# Altium PCB PCB_LNA_BFU550.PcbDoc
Units mm, origin at the board's own origin, x right, y up, seen from the top; angles counter-clockwise.
Board outline 60.58 x 30.35 mm, 2 copper layers (Top Layer, Bottom Layer); 24 components, 12 nets, 56 pads, 0 vias.
Unrouted connection lines stored in the file: 1.
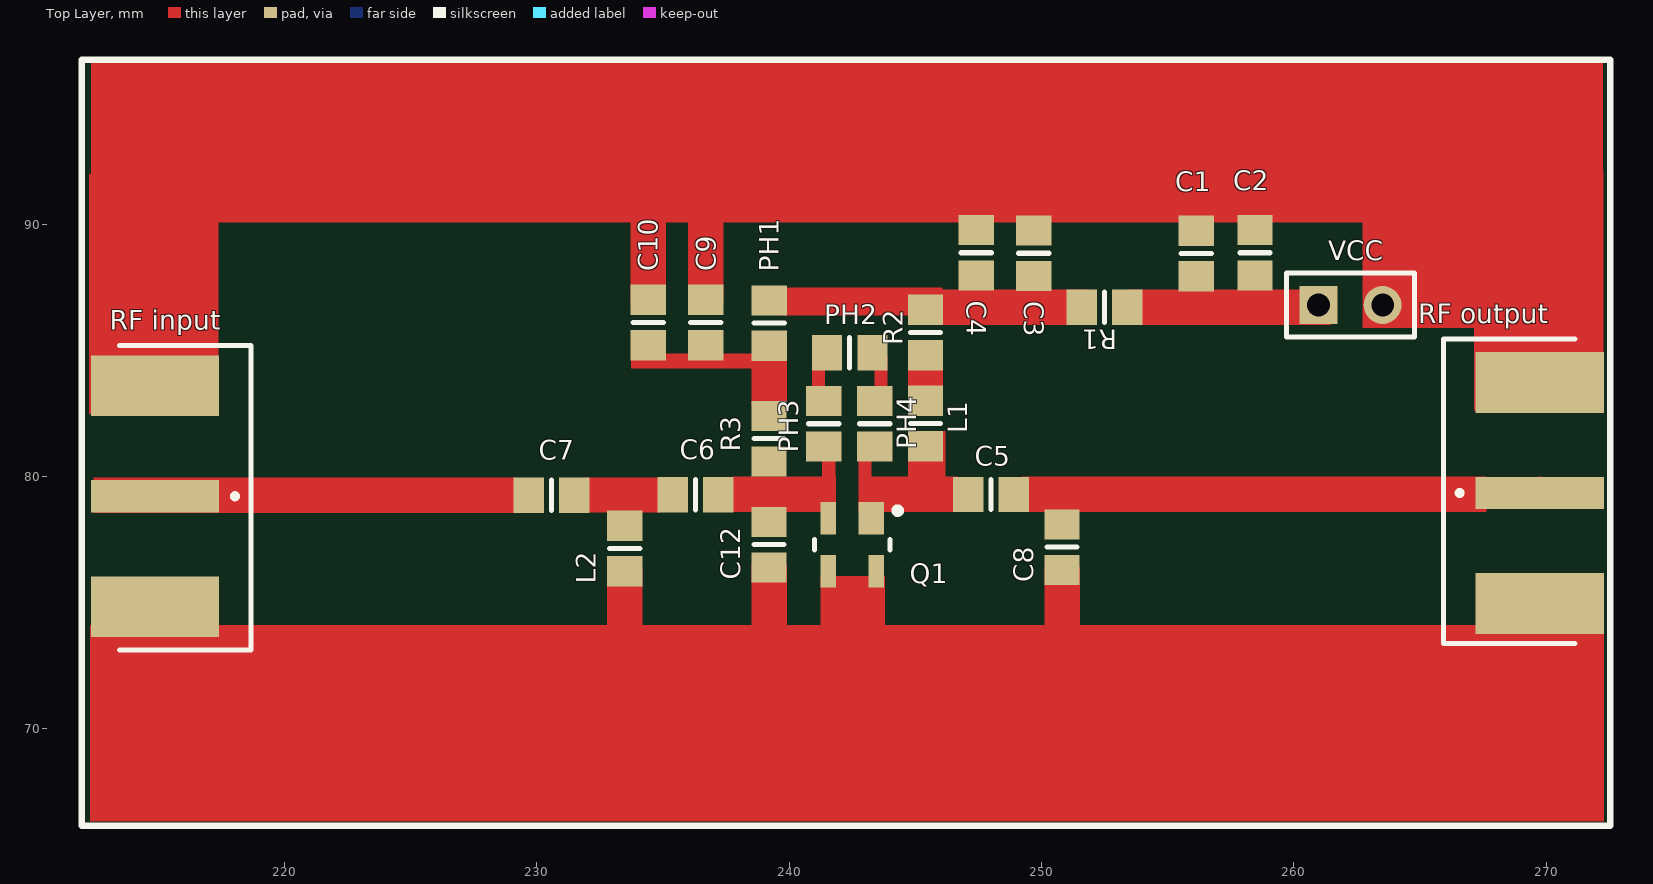
[diagram p0: Top Layer view]
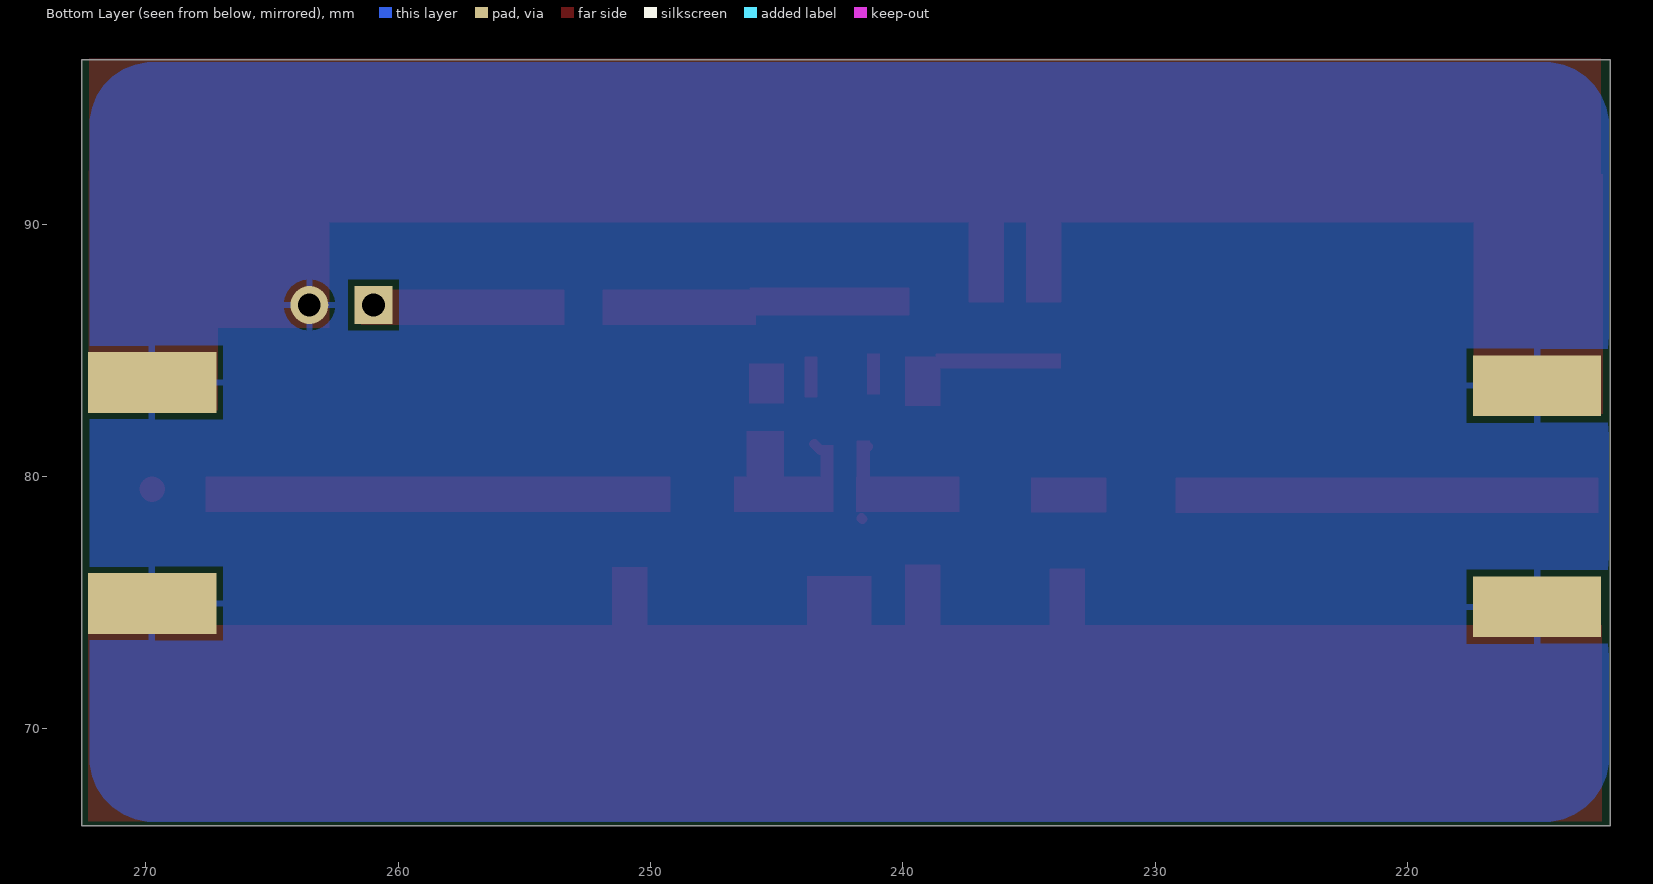
[diagram p1: Bottom Layer view, seen from below]

## Layer stack, top to bottom
Top Solder: solder mask 0.0102, Solder Resist, Dk 3.5
Top Layer: signal copper 0.0356
Dielectric 1: dielectric 0.32, FR-4, Dk 4.8
Bottom Layer: signal copper 0.0356
Bottom Solder: solder mask 0.0102, Solder Resist, Dk 3.5

## Board outline
211.963,66.167 211.963,96.52 272.542,96.52 272.542,66.167

## Design rules (kind name [scope] priority, off if disabled: settings)
Clearance [All] p1: gap=0.254 ignorepadtopadclearanceinfootprint=FALSE except(0: Arc-Hole Track-Hole SMDPad-Hole THPad-Hole Via-Hole Fill-Hole Poly-Hole Region-Hole Text-Hole)
ComponentClearance [All] p1: gap=0.01 collisioncheckmode=3 verticalgap=0.254 showdistances=FALSE donotcheckwithout3dbody=TRUE
MinimumSolderMaskSliver [All] p1: minsoldermaskwidth=0.152
PolygonConnect PolygonConnect_via [IsVia vs IsPolygon] p1: connectstyle=Direct reliefconductorwidth=0.254 reliefentries=4 polygonreliefangle="90 Angle" airgapwidth=0.254
PolygonConnect [All] p2: connectstyle=Relief reliefconductorwidth=0.254 reliefentries=4 polygonreliefangle="90 Angle" airgapwidth=0.254
RoomDefinition LNA_BFU500 [InComponentClass('LNA_BFU500')] p1: confinementstyle=ConfineIn formatcopy=TRUE lockcomponents=FALSE outline 178.943,26.924 300.482,26.924 300.482,111.379 178.943,111.379
RoutingVias [All] p1: holewidth=0.711 width=1.27 viastyle="Through Hole" minholewidth=0.711 minwidth=1.27 maxholewidth=0.711 maxwidth=1.27
SilkToSilkClearance [All] p1: silktosilkclearance=0.152
SilkToSolderMaskClearance [IsPad] p1: minsilkscreentomaskgap=0.152 clearancetoexposedcopper=TRUE
SolderMaskExpansion [All] p1: expansion=0.102 istentingtop=FALSE
Width [All] p1: maxlimit=2.54 minlimit=0.254 preferedwidth=0.254
26 further rules are at their usual default settings.

## Components (designator, comment, footprint, x,y, rotation, side; value= is the part's Value field where it differs from the comment)
C1 "Cap Pol2" 6-0805_N 256.14,88.84 r90 top value=56nF
C2 "Cap Pol2" 6-0805_N 258.46,88.87 r90 top value=220pF
C3 "Cap Pol2" 6-0805_N 249.69,88.85 r90 top value=3.9nF
C4 "Cap Pol2" 6-0805_N 247.41,88.87 r90 top value=220pF
C5 "Cap Pol2" 6-0805_N 248,79.29 r0 top value=47pF
C6 "Cap Pol2" 6-0805_N 236.29,79.28 r0 top value=5.6pF
C7 "Cap Pol2" 6-0805_N 230.58,79.26 r0 top value=47pF
C8 "Cap Pol2" 6-0805_N 250.81,77.2 r270 top value=1.8pF
C9 "Cap Pol2" 6-0805_N 236.7,86.11 r90 top value="no mounted"
C10 "Cap Pol2" 6-0805_N 234.42,86.11 r90 top value="no mounted"
C12 "Cap Pol2" 6-0805_N 239.2,77.3 r270 top value="no mounted"
L1 "Inductor" 6-0805_N 245.4,82.1 r270 top value=5.6nH
L2 "Inductor" 6-0805_N 233.48,77.15 r270 top value=8.2nH
PH1 "Res1" 6-0805_N 239.21,86.08 r90 top value=0
PH2 "Res1" 6-0805_N 242.4,84.903 r0 top value=0
PH3 "Res1" 6-0805_N 241.376,82.093 r90 top value=0
PH4 "Res1" 6-0805_N 243.386,82.093 r90 top value=0
Q1 "NPN" SOT-143_N 242.5,77.3 r270 top
R1 "" 6-0805_N 252.5,86.71 r0 top value=22
R2 "0" 6-0805_N 245.4,85.71 r90 top value=10
R3 "0" 6-0805_N 239.2,81.5 r90 top value=12K
"RF input" "SMB" SMA-142-0701-851_V2 214.86,79.22 r270 top
"RF output" "SMB" SMA-142-0701-851_V2 269.75,79.35 r90 top
VCC "Header 2" HDR1X2 260.98,86.8 r0 top

## Footprints (in the part's own frame and the unit in brackets; to place one, negate y for a bottom-side part, rotate by r counter-clockwise, add the part's x,y. Pads: shape width x height; smd on the part's side, far side on the other; paste and mask are expansions set on the pad)
6-0805_N [mm]
  rect 1.2x1.4 smd: 1(-0.9,0) 2(0.9,0)
  silkscreen extent 0,-0.6 0,0.6, body extent -1.07,-0.7 1.07,0.7, height 0.7
HDR1X2 [mm]
  rect 1.5x1.5 hole 0.9: 1(0,0)
  round 1.5 hole 0.9: 2(2.54,0)
  silkscreen extent -1.27,-1.27 3.81,1.27
SMA-142-0701-851_V2 [mil] "SMA 50 Ohm, End Launch Jack Receptacle, Tab Contact"
  rect 50x200 smd: 1(0,0)
  rect 95x200 smd: 2(-172.5,0) 2(172.5,0)
  rect 95x200 smd far side: 2(-172.5,0) 2(172.5,0)
  silkscreen extent -235,-55 240,150, body extent -187,-475 188,87, height 161
SOT-143_N [mm] "SOT143, 4-Leads, Body 2.9x1.3mm, Pitch 1.9mm, Lead Span 2.5mm, IPC Medium Density"
  rect 1.3x1 smd: 1(-1.05,0.75)
  rect 1.3x0.6 smd: 2(-1.05,-0.95) 3(1.05,-0.95) 4(1.05,0.95)
  silkscreen extent -1.47,-1.5 0.2,1.93, body extent -0.7,-1.52 0.7,1.52, height 1.1

## Part data
C1 C2 C3 C4 C5 C6 C7 C8: library part "Cap Pol2_1", "Polarized Capacitor (Axial)", LatestRevisionDate=17-Jul-2002, LatestRevisionNote="Re-released for DXP Platform.", PackageDescription="Polarized Capacitor; 2 Leads", PackageReference=POLAR0.8, Published=8-Jun-2000, Publisher="Altium Limited"
C9 C10 C12: library part "Cap Pol2_7", "Polarized Capacitor (Axial)", LatestRevisionDate=17-Jul-2002, LatestRevisionNote="Re-released for DXP Platform.", PackageDescription="Polarized Capacitor; 2 Leads", PackageReference=POLAR0.8, Published=8-Jun-2000, Publisher="Altium Limited"
PH1 PH2 PH3 PH4: library part Res1_1, "Resistor", LatestRevisionDate=17-Jul-2002, LatestRevisionNote="Re-released for DXP Platform.", PackageDescription="Axial Device, Thru-Hole; 2 Leads; 0.3 in Pin Spacing", PackageReference=AXIAL-0.3, Published=8-Jun-2000, Publisher="Altium Limited"
Q1: "NPN Bipolar Transistor", Code_JEDEC=TO-226-AA, LatestRevisionDate=17-Jul-2002, LatestRevisionNote="Re-released for DXP Platform.", PackageDescription="TO, Flat Index; 3 In-Line, Axial Leads; Body Dia. 4.8mm; Leads 0.55 x 0.51 mm (max)", PackageReference=TO-226-AA, Published=8-Jun-2000, Publisher="Altium Limited"
R1 R2 R3: library part Res1, "Resistor", LatestRevisionDate=17-Jul-2002, LatestRevisionNote="Re-released for DXP Platform.", PackageDescription="Axial Device, Thru-Hole; 2 Leads; 0.3 in Pin Spacing", PackageReference=AXIAL-0.3, Published=8-Jun-2000, Publisher="Altium Limited"
"RF input" "RF output": "SMB Straight Connector", LatestRevisionDate=17-Jul-2002, LatestRevisionNote="Re-released for DXP Platform.", Publisher="Altium Limited"
VCC: "Header, 2-Pin", LatestRevisionDate=17-Jul-2002, LatestRevisionNote="Re-released for DXP Platform.", Publisher="Altium Limited"
L1 L2: Code_IEC=1005, Code_JEITA=0402, LatestRevisionDate=29-May-2009, LatestRevisionNote="IPC-7351 Footprint Added.", PackageDescription="Chip Inductor", PackageReference=0402-A, Published=8-Jun-2000, Publisher="Altium Limited"

## Nets (pads, with @x,y where several pads share a name; then routed paths per layer and width w, separated by ;. In a path a pad name is that pad's centre, name@x,y a point inside that pad or via, vN(x,y) a via of type N, cw(c..) or ccw(c..) an arc to the next point about the centre after c; other vN are vias at no path point)
GND: "RF input.2" "RF output.2" C1.2 C2.2 C3.2 C4.2 C8.2 C9.2 C10.2 C12.2 L2.2 Q1.3 Q1.4 VCC.2
NetC1_1: C1.1 C2.1 R1.2 VCC.1
NetC3_1: C3.1 C4.1 PH1.2 R1.1 R2.2
NetC5_1: C5.1 L1.2 PH4.1 Q1.1 | length 0.4
  Top Layer w0.4: PH4.1@243.244,81.028 PH4.1@243.51,81.294
NetC5_2: "RF output.1" C5.2 C8.1 | length 0
NetC6_1: C6.1 C7.2 L2.1
NetC6_2: C6.2 C12.1 PH3.1 Q1.2 R3.1 | length 0.4
  Top Layer w0.4: PH3.1 PH3.1@241.64,80.929 ; Q1.2@241.605,78.315 Q1.2@241.64,78.35
NetC7_1: "RF input.1" C7.1
NetC9_1: C9.1 C10.1 PH1.1 R3.2
NetL1_1: L1.1 R2.1
NetPH2_1: PH2.1 PH3.2
NetPH2_2: PH2.2 PH4.2

## Polygon pours and split planes (outlines as drawn)
GND on Bottom Layer "GND_L02_P000" (solid, remove dead copper, pour order 0): 214.571,66.326 cw(c214.571,68.866) 212.031,68.866 212.031,93.885 cw(c214.571,93.885) 214.571,96.425 269.689,96.425 cw(c269.689,93.885) 272.229,93.885 272.229,68.866 cw(c269.689,68.866) 269.689,66.326

## Other copper
Top Layer:
  region net NetPH2_2: 243.376,84.755 243.376,83.13 243.9,83.13 243.9,84.755
  region net NetPH2_1: 240.896,84.875 240.896,83.25 241.42,83.25 241.42,84.875
  region net NetC5_1: 242.746,81.245 242.746,79.62 243.27,79.62 243.27,81.245
  region net NetC6_2: 241.306,81.42 241.306,79.795 241.83,79.795 241.83,81.42
  region net GND: 217.38,92 212.25,92 212.25,82.48 217.38,82.48
  region net GND: 272.27,92.13 267.14,92.13 267.14,82.61 272.27,82.61
  region net GND: 262.73,90.6 262.73,85.89 272.25,85.89 272.25,90.6
  rectangle net GND: 212.32,90.07 272.26,96.57
  rectangle net NetC1_1: 253.4,86.01 261.47,87.42
  rectangle net GND: 212.3,66.33 272.29,74.11
  region net GND: 250.11,76.41 250.11,73.41 251.52,73.41 251.52,76.41
  region net GND: 238.5,76.51 238.5,73.51 239.91,73.51 239.91,76.51
  region net GND: 232.78,76.36 232.78,73.36 234.19,73.36 234.19,76.36
  region net GND: 237.4,86.9 237.4,90.2 235.99,90.2 235.99,86.9
  region net GND: 235.12,86.9 235.12,90.14 233.71,90.14 233.71,86.9
  region net NetC3_1: 246.07,87.5 239.73,87.5 239.73,86.38 246.07,86.38
  region net NetC3_1: 251.91,87.42 245.81,87.42 245.81,86.01 251.91,86.01
  region net NetC7_1: 229.19,79.96 212.43,79.96 212.43,78.56 229.19,78.56
  region net NetC6_1: 234.93,79.97 231.93,79.97 231.93,78.57 234.93,78.57
  rectangle net NetC9_1: 233.73,84.29 238.71,84.88
  region net NetC9_1: 238.51,84.76 238.51,82.79 239.91,82.79 239.91,84.76
  region net NetC6_2: 241.85,80 237.75,80 237.75,78.6 241.85,78.6
  region net NetL1_1: 246.1,82.9 246.1,84.48 244.7,84.48 244.7,82.9
  rectangle net NetC5_2: 249.2,78.6 267.64,80
  region net NetC5_1: 246.2,79.8 246.2,81.8 244.7,81.8 244.7,79.8
  rectangle net NetC5_1: 244.7,78.6 246.7,80
  rectangle net NetC5_1: 242.75,78.6 244.8,80
  rectangle net GND: 241.24,73.279 243.79,76.05

## Silkscreen, mask and mechanical layers (free items; w line width, h text height)
Top Overlay:
  lines w0.254: 211.963,66.167 211.963,96.52 221.742,96.52 272.542,96.52 272.542,66.167 211.963,66.167

## Dimensions
211.968,96.418 to 272.542,96.52 on Top Overlay
211.963,96.52 to 211.963,66.167 on Top Overlay

## Text inside footprints (layer, text, board x,y; h text height)
"RF input": Mechanical 13 "PCB EDGE" at 212.574,72.616 h0.61
"RF output": Mechanical 13 "PCB EDGE" at 272.036,85.954 h0.61 r180